# EAGLE board CT_schematic (EAGLE 7.6.0)

Size 100 x 80 mm. Coordinates in mm from the lower left corner, seen from the top.
Outline: 0,0 100,0 100,80 0,80 0,0
Copper layers (1*16): Top 0.035mm / dielectric 1.5mm / Bottom 0.035mm
Design rules "default": minimum track width 10mil, minimum drill 24mil, track to track 8mil, track to pad 8mil, pad to pad 8mil, via to via 8mil, smd to smd 8mil, copper to edge 40mil, drill to drill 8mil, minimum pad ring 10mil, minimum via ring 8mil, stop-mask expansion 4mil, vias tented up to drill 0mil, thermal gap 10mil

## Footprints (pad centres in the part's own frame; a part is rotated, then mirrored left to right if it is on the bottom)
C0603 = smd 0.8 x 0.8: 1 -0.762,0; 2 0.762,0
C0402 = smd 0.5 x 0.5: 1 -0.508,0; 2 0.508,0
C1210 = smd 1.2 x 2.5: 1 -1.524,0; 2 1.524,0
EXV-9H = smd 3.505 x 1.676: 1 -2.857,0; 2 2.857,0
L0603 = smd 0.8 x 0.8: 1 -0.762,0; 2 0.762,0
PJ-037B_PACKAGE = drill 3.7 square: 1 12,0 | drill 3.2 square: 2 6,0
R0603 = smd 0.8 x 0.8: 1 -0.762,0; 2 0.762,0
UFQFPN48 = smd 0.559 x 0.305: 1 -3.375,2.751; 2 -3.375,2.251; 3 -3.375,1.75; 4 -3.375,1.25; 5 -3.375,0.75; 6 -3.375,0.25; 7 -3.375,-0.25; 8 -3.375,-0.75; 9 -3.375,-1.25; 10 -3.375,-1.75; 11 -3.375,-2.251; 12 -3.375,-2.751; 25 3.375,-2.751; 26 3.375,-2.251; 27 3.375,-1.75; 28 3.375,-1.25; 29 3.375,-0.75; 30 3.375,-0.25; 31 3.375,0.25; 32 3.375,0.75; 33 3.375,1.25; 34 3.375,1.75; 35 3.375,2.251; 36 3.375,2.751 | smd 0.305 x 0.559: 13 -2.751,-3.375; 14 -2.251,-3.375; 15 -1.75,-3.375; 16 -1.25,-3.375; 17 -0.75,-3.375; 18 -0.25,-3.375; 19 0.25,-3.375; 20 0.75,-3.375; 21 1.25,-3.375; 22 1.75,-3.375; 23 2.251,-3.375; 24 2.751,-3.375; 37 2.751,3.375; 38 2.251,3.375; 39 1.75,3.375; 40 1.25,3.375; 41 0.75,3.375; 42 0.25,3.375; 43 -0.25,3.375; 44 -0.75,3.375; 45 -1.25,3.375; 46 -1.75,3.375; 47 -2.251,3.375; 48 -2.751,3.375 | smd 5.588 x 5.588: 49 0,0
TST-110-05-T-D-RA = drill 1 pad 1.7 square: 1 0,0 | drill 1 pad 1.7: 2 0,2.54; 3 2.54,0; 4 2.54,2.54; 5 5.08,0; 6 5.08,2.54; 7 7.62,0; 8 7.62,2.54; 9 10.16,0; 10 10.16,2.54; 11 12.7,0; 12 12.7,2.54; 13 15.24,0; 14 15.24,2.54; 15 17.78,0; 16 17.78,2.54; 17 20.32,0; 18 20.32,2.54; 19 22.86,0; 20 22.86,2.54
TDFN-8/6MM = smd 0.3 x 0.75: 1 0,0; 2 0.5,0; 3 1,0; 4 1.5,0; 5 1.5,3; 6 1,3; 7 0.5,3; 8 0,3
SMD-8 = smd 0.72 x 0.6: 1 -1.45,-0.7; 2 -0.485,-0.7; 3 0.485,-0.7; 4 1.455,-0.7; 5 1.455,0.7; 6 0.485,0.7; 7 -0.485,0.7; 8 -1.455,0.7
ABS07-32.768KHZ-7-T = smd 1.1 x 2.4: 1 -2.5,0; 2 0,0
ASFL1 = smd 1.7 x 1.5: 1 -1.27,-1.1; 2 1.27,-1.1; 3 1.27,1.1; 4 -1.27,1.1
WSON-8 = smd 0.3 x 0.6: 1 -0.75,0; 2 0.05,0; 3 0.85,0; 4 1.65,0; 5 1.65,3.8; 6 0.85,3.8; 7 0.05,3.8; 8 -0.75,3.8 | smd 3 x 2.6: PAD 0.45,1.9
SON-6 = smd 0.55 x 0.3: 1 -0.355,0.5 | smd 0.52 x 0.3: 2 -0.37,0; 3 -0.37,-0.5; 4 0.37,-0.5; 5 0.37,0; 6 0.37,0.5
SW_4-1437565-2 = smd 1.4 x 2.1: 1 -2.23,4.55; 2 -2.23,-4.55; 3 2.23,4.55; 4 2.23,-4.55
LGM67K-G1J2-24-Z = smd 0.8 x 1.4: A -2,0; C 0,0
NC7SZ125M5X = smd 1.3 x 0.7: 1 -1.3,0.95; 2 -1.3,0; 3 -1.3,-0.95; 4 1.3,-0.95; 5 1.3,0.95

## Placement (x,y rotation side)
C1  1e-07  [C0603]  -27.94,53.34 0 top  (outside the outline)
C2  1e-07  [C0603]  -31.75,53.34 0 top  (outside the outline)
C3  1e-07  [C0603]  -35.56,53.34 0 top  (outside the outline)
C4  1e-07  [C0603]  -39.37,53.34 0 top  (outside the outline)
C5  4.7e-06  [C0603]  -24.13,53.34 0 top  (outside the outline)
C6  1e-07  [C0603]  -43.18,53.34 0 top  (outside the outline)
C7  1e-08  [C0603]  -46.99,53.34 0 top  (outside the outline)
C8  1e-06  [C0603]  -50.8,53.34 0 top  (outside the outline)
C9  1e-11  [C0402]  -53.34,58.42 0 top  (outside the outline)
C10  1e-11  [C0402]  -57.15,58.42 0 top  (outside the outline)
C11  1e-07  [C0402]  -60.96,58.42 0 top  (outside the outline)
C12  1e-07  [C0402]  -64.77,58.42 0 top  (outside the outline)
C13  1e-08  [C0402]  -15.24,63.5 0 top  (outside the outline)
C14  1e-06  [C0603]  -54.61,53.34 0 top  (outside the outline)
C15  1e-06  [C0603]  -58.42,53.34 0 top  (outside the outline)
C16  1e-08  [C0402]  -19.05,63.5 0 top  (outside the outline)
C17  1e-08  [C0402]  -22.86,63.5 0 top  (outside the outline)
C18  1e-05  [C1210]  -59.69,35.56 0 top  (outside the outline)
C19  1e-05  [C1210]  -16.51,43.18 0 top  (outside the outline)
C20  1e-07  [C0402]  -26.67,63.5 0 top  (outside the outline)
C21  0.0001  [EXV-9H]  -54.61,27.94 0 top  (outside the outline)
C22  0.0001  [EXV-9H]  -17.78,35.56 0 top  (outside the outline)
C23  1e-08  [C0402]  -30.48,63.5 0 top  (outside the outline)
C24  1e-08  [C0402]  -34.29,63.5 0 top  (outside the outline)
F1  240.0  [L0603]  -62.23,53.34 0 top  (outside the outline)
J1  PJ-037B  [PJ-037B_PACKAGE]  -27.94,7.62 0 top  (outside the outline)
R1  10000.0  [R0603]  -55.88,41.91 0 top  (outside the outline)
R2  1000.0  [R0603]  -15.24,58.42 0 top  (outside the outline)
R3  1600.5  [R0603]  -19.05,58.42 0 top  (outside the outline)
R4  4700.0  [R0603]  -22.86,58.42 0 top  (outside the outline)
R5  2200.0  [R0603]  -26.67,58.42 0 top  (outside the outline)
R6  2200.0  [R0603]  -30.48,58.42 0 top  (outside the outline)
R7  2200.0  [R0603]  -34.29,58.42 0 top  (outside the outline)
R8  2200.0  [R0603]  -38.1,58.42 0 top  (outside the outline)
R9  10000.0  [R0603]  -60.96,41.91 0 top  (outside the outline)
R10  10000.0  [R0603]  -15.24,48.26 0 top  (outside the outline)
R11  10000.0  [R0603]  -20.32,48.26 0 top  (outside the outline)
R12  10000.0  [R0603]  -25.4,48.26 0 top  (outside the outline)
R13  10000.0  [R0603]  -30.48,48.26 0 top  (outside the outline)
R14  10000.0  [R0603]  -35.56,48.26 0 top  (outside the outline)
R15  10000.0  [R0603]  -40.64,48.26 0 top  (outside the outline)
R16  10000.0  [R0603]  -45.72,48.26 0 top  (outside the outline)
R17  10000.0  [R0603]  -50.8,48.26 0 top  (outside the outline)
R18  10000.0  [R0603]  -55.88,48.26 0 top  (outside the outline)
R19  10000.0  [R0603]  -60.96,48.26 0 top  (outside the outline)
R20  100000.0  [R0603]  -40.64,41.91 0 top  (outside the outline)
R21  2231.0  [R0603]  -41.91,58.42 0 top  (outside the outline)
R22  1000.0  [R0603]  -45.72,58.42 0 top  (outside the outline)
R23  10000.0  [R0603]  -15.24,53.34 0 top  (outside the outline)
R24  10000.0  [R0603]  -20.32,53.34 0 top  (outside the outline)
R25  9100.0  [R0603]  -49.53,58.42 0 top  (outside the outline)
R26  680000.0  [R0603]  -45.72,41.91 0 top  (outside the outline)
R27  120000.0  [R0603]  -50.8,41.91 0 top  (outside the outline)
U1  STM32L152C8U6A  [UFQFPN48]  -38.1,19.05 0 top  (outside the outline)
U2  TST-110-05-T-D-RA  [TST-110-05-T-D-RA]  -46.99,25.4 0 top  (outside the outline)
U3  24AA128T-I/MNY  [TDFN-8/6MM]  -60.96,3.81 0 top  (outside the outline)
U4  TMD27711  [SMD-8]  -35.56,41.91 0 top  (outside the outline)
U5  ABS07-32.768KHZ-7-T  [ABS07-32.768KHZ-7-T]  -39.37,35.56 0 top  (outside the outline)
U6  ASFL1-25MHZ-NCS  [ASFL1]  -57.15,19.05 0 top  (outside the outline)
U7  LP3878SDX-ADJ/NOPB  [WSON-8]  -30.48,17.78 0 top  (outside the outline)
U8  TPS3895ADRYR  [SON-6]  -36.83,62.23 0 top  (outside the outline)
U9  4-1437565-2  [SW_4-1437565-2]  -44.45,6.35 0 top  (outside the outline)
U10  Q65110A2395  [LGM67K-G1J2-24-Z]  -48.26,35.56 0 top  (outside the outline)
U11  nc7sz125m5x  [NC7SZ125M5X]  -21.59,41.91 0 top  (outside the outline)
U12  nc7sz125m5x  [NC7SZ125M5X]  -27.94,41.91 0 top  (outside the outline)

## Library data of the parts
C1-C24 F1 J1 R1-R27 U1-U12 = circuit_tree

## Nets
CLK_CRYSTAL_U1_3: C9.1 U1.3 U5.1
CLK_CRYSTAL_U1_4: C10.1 U1.4 U5.2
CLK_U1_5: U1.5 U6.3
GND: C1.2 C2.2 C3.2 C4.2 C5.2 C6.2 C7.2 C8.2 C9.2 C10.2 C11.2 C12.2 C13.2 C14.2 C15.2 C16.2 C17.2 C18.2 C19.2 C20.2 C21.2 C22.2 C23.2 C24.2 J1.2 R2.2 R9.2 R15.2 R17.2 R18.2 R22.2 R25.2 R27.2 U1.8 U1.23 U1.35 U1.47 U1.49 U2.4 U2.6 U2.8 U2.10 U2.12 U2.14 U2.16 U2.18 U2.20 U3.4 U3.7 U4.3 U6.2 U7.3 U7.PAD U8.2 U10.C U11.2 U11.3 U12.1 U12.3
NET_U1_1: C6.1 U1.1
NET_U1_7: R4.1 U1.7 U12.4
NET_U1_9: C7.1 C8.1 F1.1 U1.9
NET_U1_21: R7.1 U1.21 U3.6
NET_U1_22: R8.1 U1.22 U3.5
NET_U1_42: R5.1 U1.42 U4.2
NET_U1_43: R6.1 U1.43 U4.8
NET_U1_44: R9.1 U1.44
NET_U1_45: R3.1 U1.45 U10.A
NET_U1_46: R1.1 U1.46 U9.3 U9.4
NET_U2_19: R15.1 U2.19
NET_U3_1: R16.1 U3.1
NET_U3_2: R17.1 U3.2
NET_U3_3: R18.1 U3.3
NET_U4_5: U4.5
NET_U4_6: U4.6
NET_U4_7: R19.1 U4.7
NET_U7_1: C17.1 U7.1
NET_U7_6: R21.2 R22.1 U7.6
NET_U7_8: R20.1 U7.8
NET_U8_1: R24.1 R25.1 U8.1
NET_U8_3: R26.2 R27.1 U8.3
NET_U8_4: R23.1 U8.4 U11.4 U12.2
NET_U9_1: R2.1 U9.1 U9.2
PROC_SYS_JTCK_SWCLK: R13.1 U1.37 U2.9
PROC_SYS_JTDI: R11.1 U1.38 U2.5
PROC_SYS_JTDO_TRACESWO: U1.39 U2.13
PROC_SYS_JTMS_SWDIO: R12.1 U1.34 U2.7
PROC_SYS_JTRST: R10.1 U1.40 U2.3
RST_OUT_U2_SRESET_B: R14.1 U2.15 U11.1
VCC_S1_12V5: C18.1 C21.1 C22.1 J1.1 R20.2 U7.4
VCC_TIER1_3V3: C1.1 C2.1 C3.1 C4.1 C5.1 C11.1 C12.1 C13.1 C14.1 C15.1 C16.1 C19.1 C20.1 C23.1 C24.1 F1.2 R1.2 R3.2 R4.2 R5.2 R6.2 R7.2 R8.2 R10.2 R11.2 R12.2 R13.2 R14.2 R16.2 R19.2 R21.1 R23.2 R24.2 R26.1 U1.24 U1.36 U1.48 U2.1 U2.2 U3.8 U4.1 U4.4 U6.4 U7.5 U8.6 U11.5 U12.5

## Tracks (layer width: path | path; a pad name or v marks a point on that pad's centre or on a via)
CLK_CRYSTAL_U1_3  (2 unrouted)
CLK_CRYSTAL_U1_4  (2 unrouted)
CLK_U1_5  (1 unrouted)
GND  (58 unrouted)
NET_U1_1  (1 unrouted)
NET_U1_7  (2 unrouted)
NET_U1_9  (3 unrouted)
NET_U1_21  (2 unrouted)
NET_U1_22  (2 unrouted)
NET_U1_42  (2 unrouted)
NET_U1_43  (2 unrouted)
NET_U1_44  (1 unrouted)
NET_U1_45  (2 unrouted)
NET_U1_46  (3 unrouted)
NET_U2_19  (1 unrouted)
NET_U3_1  (1 unrouted)
NET_U3_2  (1 unrouted)
NET_U3_3  (1 unrouted)
NET_U4_7  (1 unrouted)
NET_U7_1  (1 unrouted)
NET_U7_6  (2 unrouted)
NET_U7_8  (1 unrouted)
NET_U8_1  (2 unrouted)
NET_U8_3  (2 unrouted)
NET_U8_4  (3 unrouted)
NET_U9_1  (2 unrouted)
PROC_SYS_JTCK_SWCLK  (2 unrouted)
PROC_SYS_JTDI  (2 unrouted)
PROC_SYS_JTDO_TRACESWO  (1 unrouted)
PROC_SYS_JTMS_SWDIO  (2 unrouted)
PROC_SYS_JTRST  (2 unrouted)
RST_OUT_U2_SRESET_B  (2 unrouted)
VCC_S1_12V5  (5 unrouted)
VCC_TIER1_3V3  (46 unrouted)